# Altium PCB EN-C200_RA2.PcbDoc (part 3 of 3)
Units mil, origin at the board's own origin, x right, y up, seen from the top; angles counter-clockwise.
Board outline 4940 x 2525 mil, 2 copper layers (TOP, BOTTOM), stack 39.8 mil thick; 190 components, 128 nets, 643 pads, 1902 vias.
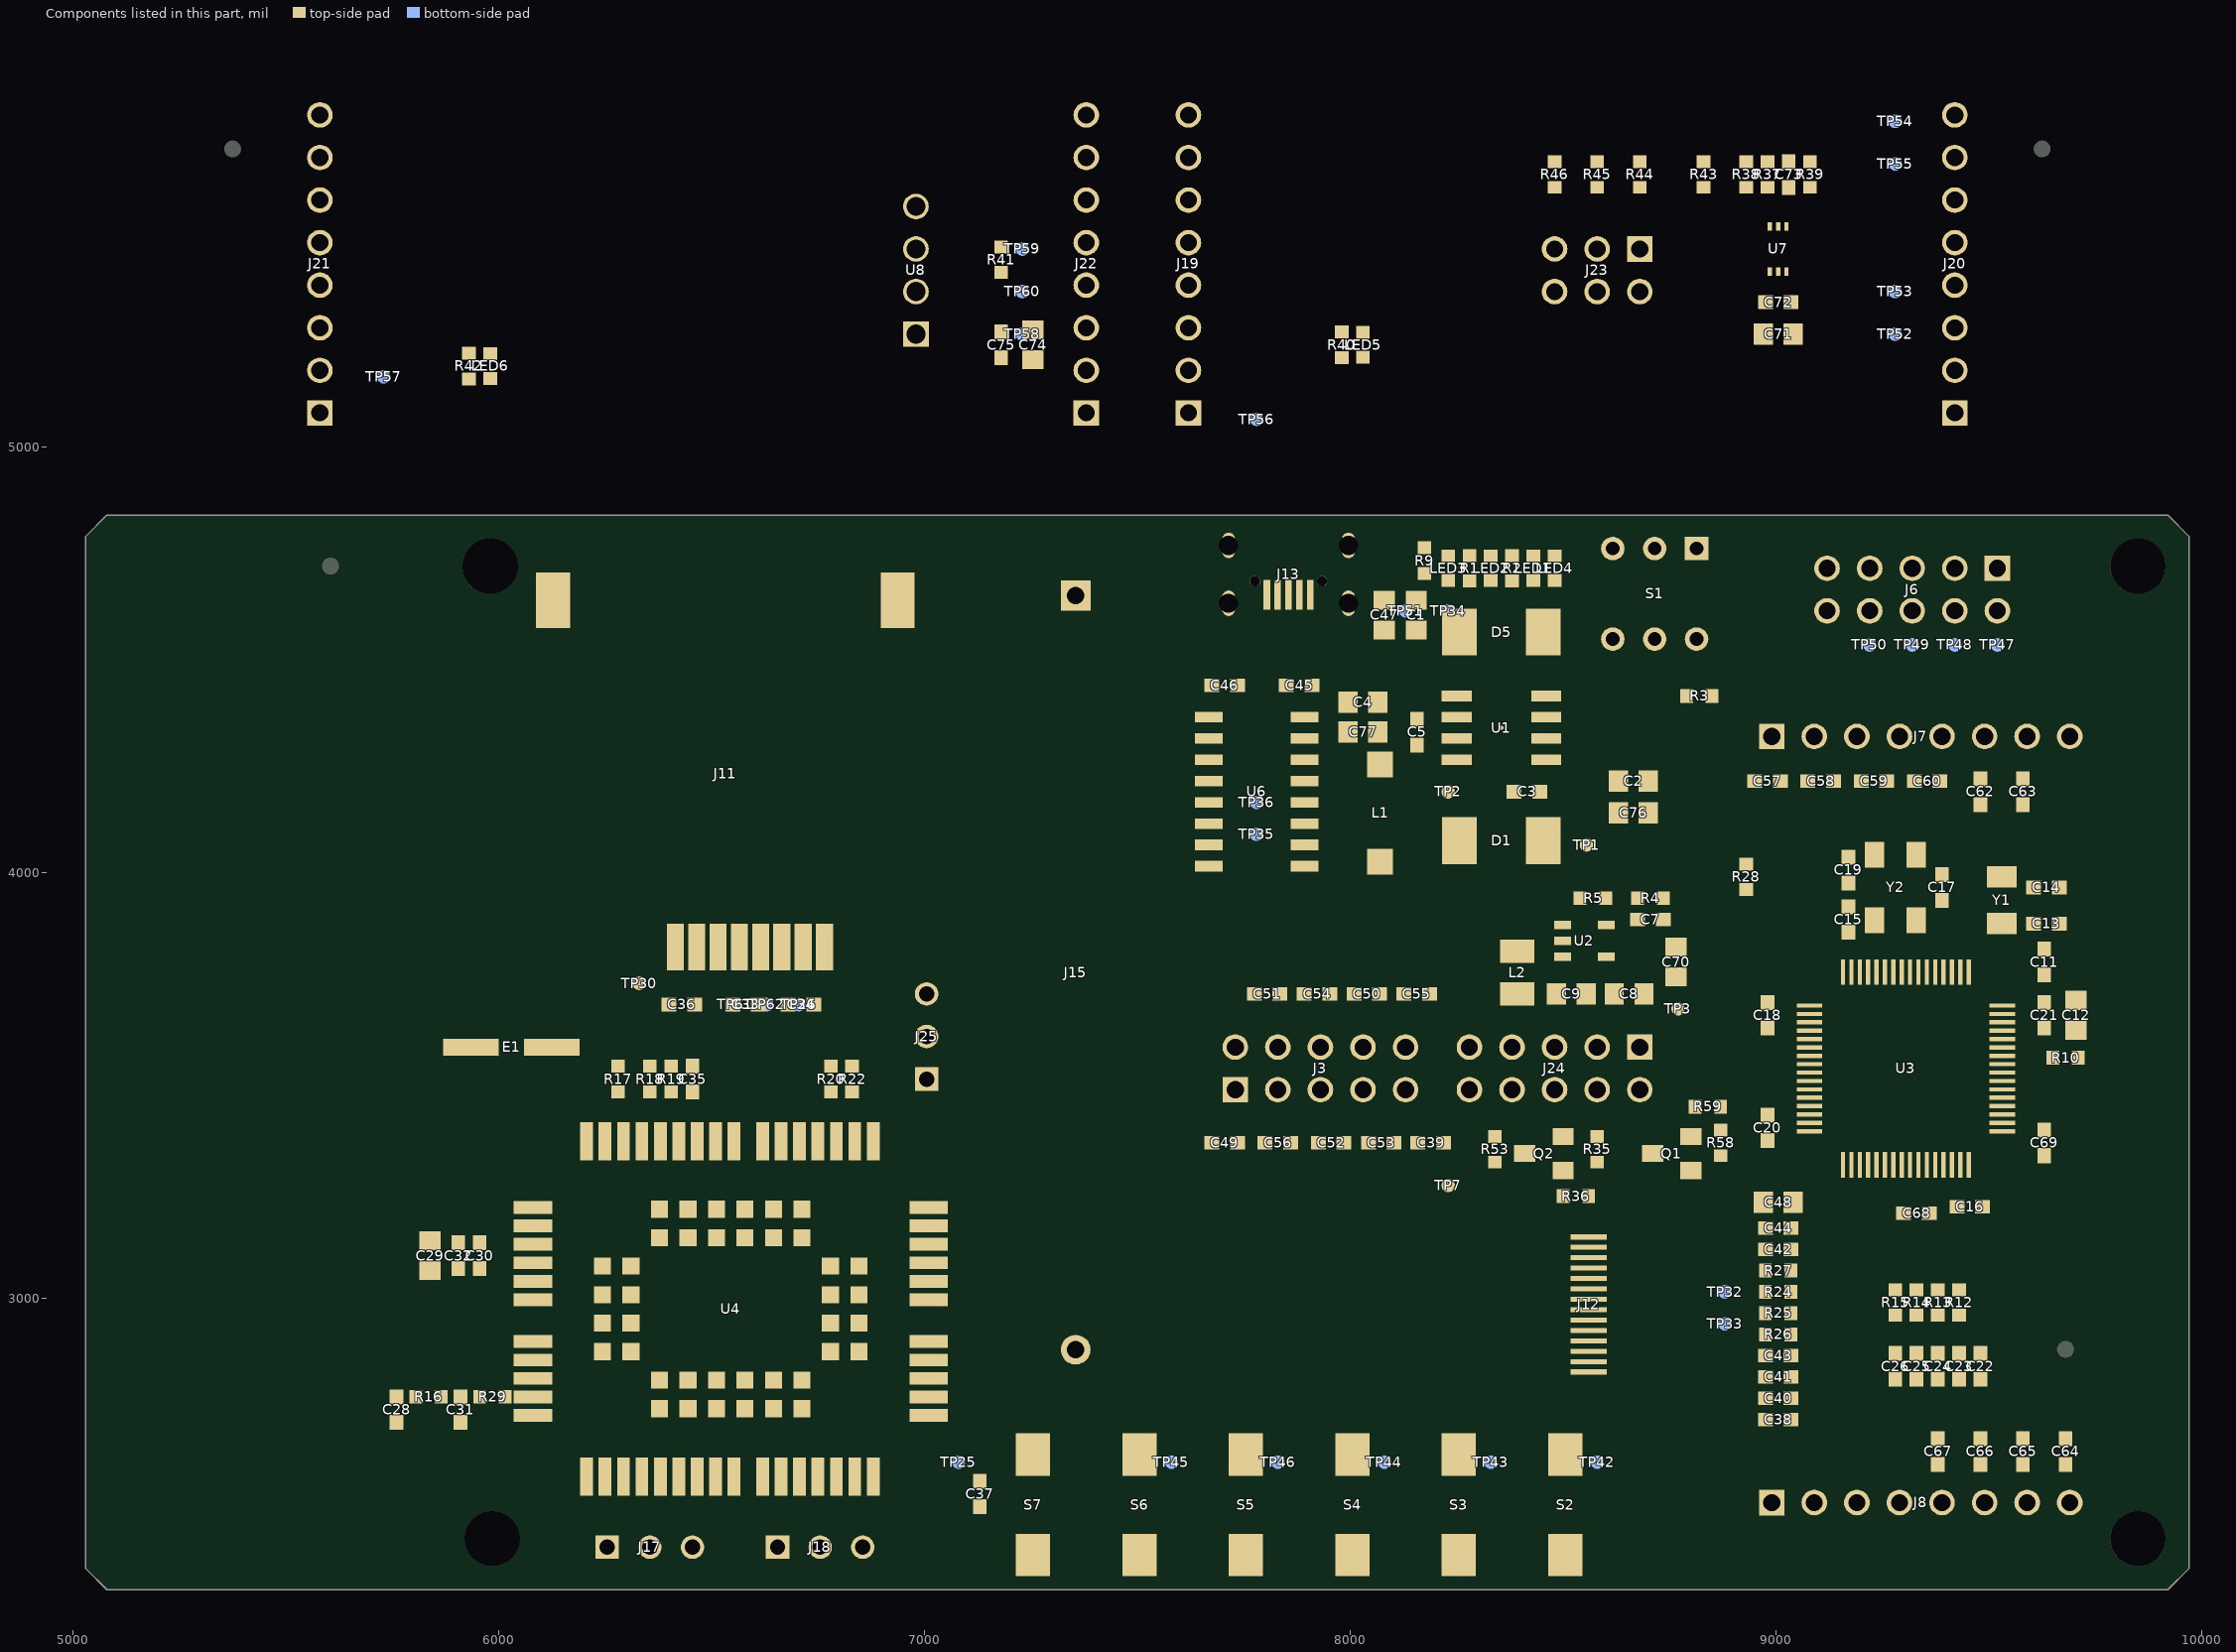
[diagram p3: the components of this part, seen from the top]

## Silkscreen, mask and mechanical layers (free items; w line width, h text height) (continued)
OUTLINE:
  lines w1: 5030,4940 5440,4940 ; 5030,5920 5440,5920 ; 9970,4940 9560,4940 ; 5080,4840 5030,4790 5030,2365 5080,2315 9920,2315 9970,2365 9970,4790 9920,4840 ; 5080,4840 9920,4840 ; 5080,4840 5080,4880 5030,4880 5030,5970 5080,6020 9920,6020 9970,5970 9970,5920 ; 5530,4940 7430,4940 ; 5530,4940 5480,4990 5480,5870 5530,5920 ; 5530,4940 5530,4900 5440,4900 5440,5960 5530,5960 5530,5920 ; 5530,5920 7430,5920 ; 7430,4940 7480,4990 7480,5870 7430,5920 ; 7430,4940 7430,4900 7570,4900 7570,4940 ; 7430,5920 7430,5960 7570,5960 7570,5920 ; 7570,4940 7520,4990 7520,5870 7570,5920 ; 7570,4940 9470,4940 ; 7570,5920 9470,5920 ; 9470,4940 9470,4900 9560,4900 9560,4940 ; 9470,4940 9520,4990 9520,5870 9470,5920 ; 9470,5920 9470,5960 9560,5960 9560,5920 ; 9560,4940 9560,5920 ; 9560,5920 9970,5920 ; 9920,4840 9920,4880 9970,4880 9970,5920

## Dimensions
5530,5920 to 5530,4940 on Drill Drawing
5080,4840 to 5080,2315 on Drill Drawing
5080,6020 to 5080,2315 on Drill Drawing
5030,5970 to 9970,5970 on Drill Drawing

## Text inside footprints (layer, text, board x,y; h text height)
J13: Top Overlay "VCC" at 7950,4525 h30 r90; Top Overlay "ID" at 7830,4545 h30 r90; Top Overlay "GND" at 7790,4525 h30 r90; Top Overlay "D+" at 7870,4550 h30 r90; Top Overlay "D-" at 7910,4550 h30 r90
Y2: Top Overlay "1" at 9200,4085 h30